# Altium PCB CH32V20xF8-R0-1v0.PcbDoc
Units mil, origin at the board's own origin, x right, y up, seen from the top; angles counter-clockwise.
Board outline 1496.06 x 2165.35 mil, 2 copper layers (Top Layer, Bottom Layer); 23 components, 30 nets, 110 pads, 405 vias.
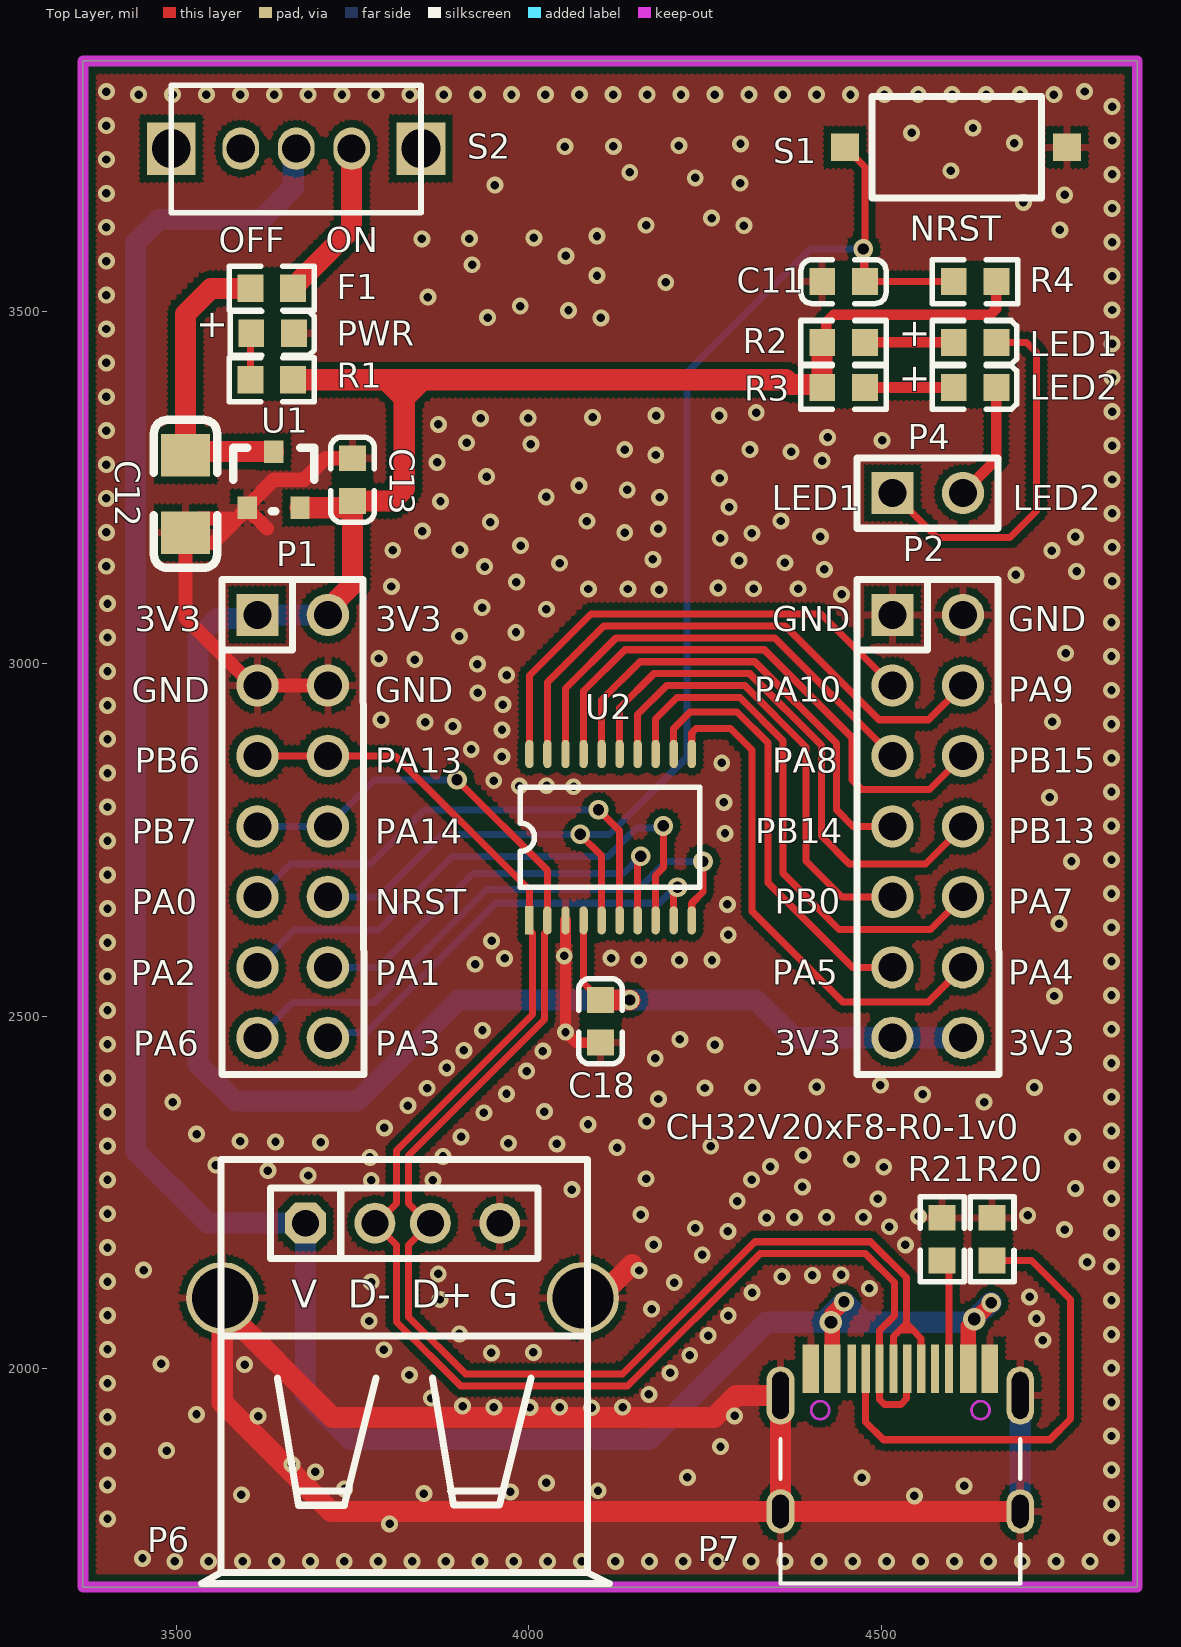
[diagram p0: Top Layer view]
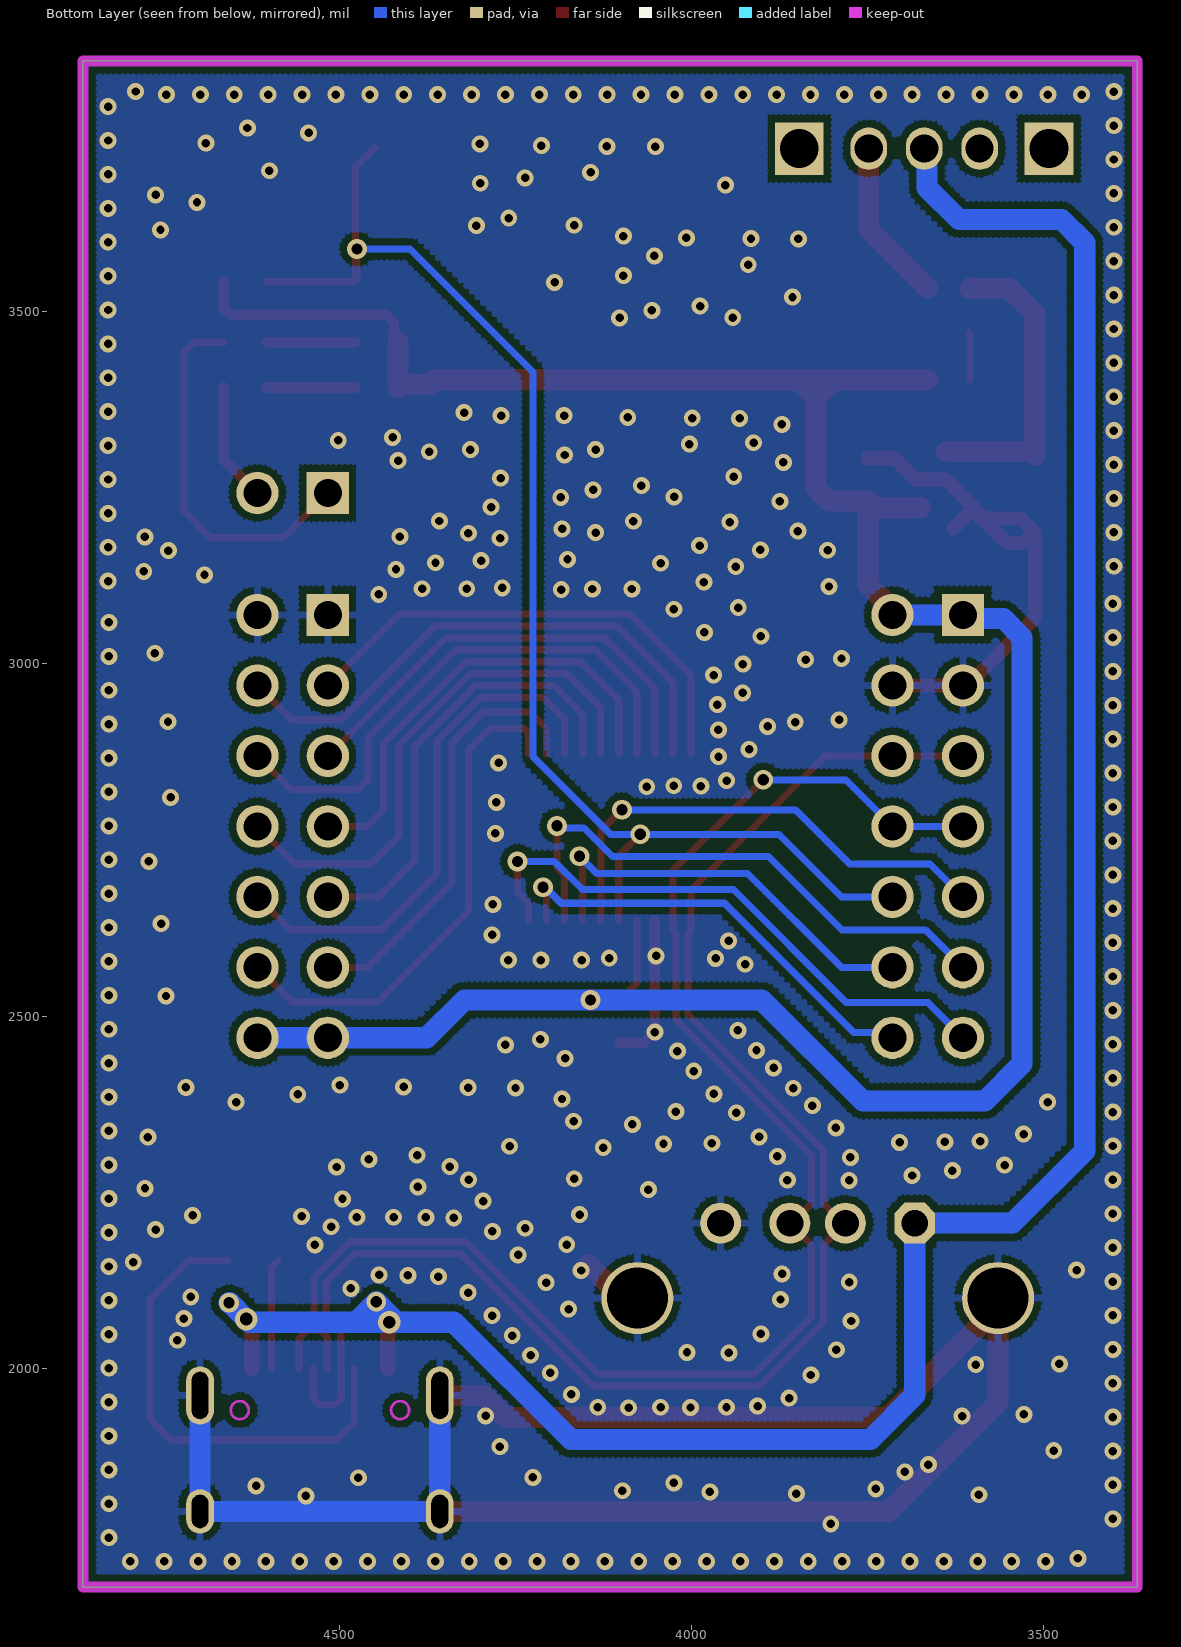
[diagram p1: Bottom Layer view, seen from below]

## Layer stack, top to bottom
Top Solder: solder mask 0.4, Solder Resist, Dk 3.5
Top Layer: signal copper 1.4
Dielectric 1: dielectric 12.6, FR-4, Dk 4.8
Bottom Layer: signal copper 1.4
Bottom Solder: solder mask 0.4, Solder Resist, Dk 3.5

## Board outline
3367.52,1690 4863.58,1690 4863.58,3855.35 3367.52,3855.35

## Design rules (kind name [scope] priority, off if disabled: settings)
Clearance Clearance_1 [InPolygon] p1: gap=10 ignorepadtopadclearanceinfootprint=FALSE
Clearance [All] p2: gap=7 ignorepadtopadclearanceinfootprint=FALSE
ComponentClearance [All] p1 off: gap=10 collisioncheckmode=3 verticalgap=10 showdistances=FALSE
DiffPairsRouting [All] p1: maxlimit=10 minlimit=7 mostfreqgap=8 toplayer_minwidth=6 toplayer_maxwidth=15 toplayer_prefwidth=8 bottomlayer_minwidth=6 bottomlayer_maxwidth=15 bottomlayer_prefwidth=8 maxuncoupledlength=500
MinimumSolderMaskSliver [All] p1 off: minsoldermaskwidth=10
PolygonConnect PolygonConnect_1 [IsVia] p1: connectstyle=Direct reliefconductorwidth=10 reliefentries=4 polygonreliefangle="90 Angle" airgapwidth=10
PolygonConnect [All] p2: connectstyle=Relief reliefconductorwidth=10 reliefentries=4 polygonreliefangle="90 Angle" airgapwidth=10
RoutingVias [All] p1: holewidth=16 width=28 viastyle="Through Hole" minholewidth=12 minwidth=24 maxholewidth=28 maxwidth=50
SilkToSilkClearance [All] p1 off: silktosilkclearance=10
SilkToSolderMaskClearance [IsPad] p1 off: minsilkscreentomaskgap=10 clearancetoexposedcopper=TRUE
SolderMaskExpansion [All] p1: expansion=4 istentingtop=FALSE
Width [All] p1: maxlimit=100 minlimit=6 preferedwidth=10
25 further rules are at their usual default settings.

## Classes and differential pairs
differential pair NewDifferentialPair1: +PA13 -PA14

## Components (designator, comment, footprint, x,y, rotation, side; value= is the part's Value field where it differs from the comment)
C11 "0.1uF" 0603_C 4416.37,3542.25 r0 top
C12 "10uF" 3216_C 3513,3296 r90 top
C13 "2.2uF" 0603_C 3750,3291.63 r270 top
C18 "0.1uF" 0603_C 4101.87,2462.44 r90 top value=15pF
F1 "500mA" 0603 3665.63,3533 r180 top
LED1 "LED1" 0603+ 4603,3456 r0 top (schematic designator D2)
LED2 "LED2" 0603+ 4603,3392 r0 top (schematic designator D3)
P1 "Header 7X2" IDC14-2.54mm 3615,3069.32 r0 top
P2 "Header 7X2" IDC14-2.54mm 4516.1,3069.32 r0 top
P4 "2HEAD" SIP2-2.54mm 4516.1,3242.32 r270 top
P6 "USB_A" USBAF 3683.29,2206.31 r0 top
P7 "TYPE-C" TYPE-C-Receptacle-2.0 4527.34,2000 r0 top
PWR "POWER  red" 0603+ 3606.38,3469 r0 top (schematic designator D1)
R1 "1K" 0603 3605,3403 r0 top
R2 "1K" 0603 4416.37,3456 r0 top
R3 "1K" 0603 4416.37,3392 r0 top
R4 "10K" 0603 4603,3542.25 r0 top
R20 "NC(5.1K)" 0603 4657.48,2153.23 r90 top
R21 "NC(5.1K)" 0603 4586.61,2153.23 r90 top
S1 "NRST" SMD_6.1x3.65x2.5mm-KEY 4448.82,3732.91 r0 top
S2 "SW" KEY2 3670,3731 r0 top
U1 "6219P33M" SOT-23 3600.6,3221.47 r0 top
U2 "CH32V203F8" TSSOP20 4000.99,2636 r0 top

## Footprints (in the part's own frame and the unit in brackets; to place one, negate y for a bottom-side part, rotate by r counter-clockwise, add the part's x,y. Pads: shape width x height; smd on the part's side, far side on the other; paste and mask are expansions set on the pad)
0603 [mm]
  rect 0.93x0.98 smd: 1(0,0) 2(1.54,0)
  silkscreen extent -0.76,-0.79 2.3,0.79
0603+ [mm]
  rect 0.93x0.98 smd: 1(0,0) 2(1.54,0)
  silkscreen extent -0.76,-0.79 2.27,0.79
0603_C [mm]
  rect 0.93x0.98 smd: 1(0,0) 2(1.54,0)
  silkscreen extent -0.76,-0.79 2.31,0.79
3216_C [mil]
  rect 60x70 smd: 1(0,0) 2(-110,0)
  silkscreen extent -160,-45 50,45
IDC14-2.54mm [mil]
  rect 60x60 hole 40: 1(0,0)
  round 60 hole 40: 2(100,0) 3(0,-100) 4(100,-100) 5(0,-200) 6(100,-200) 7(0,-300) 8(100,-300) 9(0,-400) 10(100,-400) 11(0,-500) 12(100,-500) 13(0,-600) 14(100,-600)
  silkscreen extent -50,-652 151,50
KEY2 [mm]
  rect 1.75x1.9 hole 1.4: 0(-4.5,0) 0(4.5,0)
  oval 1.321x1.524 hole 1.016: 1(0,0) 2(-2,0) 3(2,0)
  silkscreen extent -4.51,-2.31 4.5,2.29
SIP2-2.54mm [mil]
  rect 60x60 hole 40: 1(0,0)
  round 60 hole 40: 2(0,100)
  silkscreen extent -50,-50 50,150
SMD_6.1x3.65x2.5mm-KEY [mm]
  rect 1x1 smd: 1(0,0) 2(8,0)
  silkscreen extent 0.98,-1.83 7.08,1.83
SOT-23 [mm]
  rect 0.7x0.8 smd: 1(0,0) 2(1.9,0) 3(0.95,2.02)
  silkscreen extent -0.51,-0.13 2.41,2.16
TSSOP20 [mil]
  rect 12x40 smd: 1(0,0)
  oval 12x40 smd: 2(25.6,0) 3(51.2,0) 4(76.8,0) 5(102.4,0) 6(128,0) 7(153.5,0) 8(179.1,0) 9(204.7,0) 10(230.3,0) 11(230.3,236) 12(204.7,236) 13(179.1,236) 14(153.5,236) 15(128,236) 16(102.4,236) 17(76.8,236) 18(51.2,236) 19(25.6,236) 20(0,236)
  silkscreen extent -13,47 242,189
TYPE-C-Receptacle-2.0 [mm]
  oval 1x1.6 hole 0.6 slot 1.2 at 90 deg: 0(-4.32,-5.15) 0(4.32,-5.15)
  oval 1x2.1 hole 0.6 slot 1.7 at 90 deg: 0(-4.32,-0.97) 0(4.32,-0.97)
  rect 0.6x1.75 smd: A1(-3.225,0) A4(-2.45,0) B1(3.225,0) B4(2.45,0)
  rect 0.3x1.75 smd: A5(-1.25,0) A6(-0.25,0) A7(0.25,0) A8(1.25,0) B5(1.75,0) B6(0.75,0) B7(-0.75,0) B8(-1.75,0)
  Keep-Out Layer circle w0.1: c-2.89,-1.5 r0.325
  Keep-Out Layer circle w0.1: c2.89,-1.5 r0.325
  silkscreen extent -4.32,-7.75 4.32,-2.55
USBAF [mm]
  round 2.6 hole 2.2: 0(-3,-2.7) 0(10,-2.7)
  oct 1.473x1.473 hole 0.965: 1(0,0)
  round 1.473 hole 0.965: 2(2.5,0) 3(4.5,0) 4(7,0)
  silkscreen extent -3.75,-12.99 10.95,2.29

## Part data
C11 C18: library part Cap, "Capacitor", LatestRevisionDate=17-Jul-2002, LatestRevisionNote="Re-released for DXP Platform.", PackageReference=RAD-0.3, Published=8-Jun-2000, Publisher="Altium Limited"
C12 C13: library part CAP, "Capacitor"
F1: library part FUSE1, "Fuse"
LED1 LED2 PWR: library part LED0, "Typical INFRARED GaAs LED", LatestRevisionDate=08-Jul-2005, LatestRevisionNote="Mech Layer 1 removed.", PackageReference=LED-0, Published=8-Jun-2000, Publisher="Altium Limited"
P1 P2: "Header, 7-Pin, Dual row", LatestRevisionDate=17-Jul-2002, LatestRevisionNote="Re-released for DXP Platform.", Publisher="Altium Limited"
P6: library part USB, "USB Port"
P7: library part TYPE-C1
R1 R2 R3: library part "Res Semi", "Semiconductor Resistor", LatestRevisionDate=17-Jul-2002, LatestRevisionNote="Re-released for DXP Platform.", PackageReference=AXIAL-0.5, Published=8-Jun-2000, Publisher="Altium Limited"
R4 R20 R21: library part Res2, "Resistor"
  R4: LatestRevisionDate=17-Jul-2002, LatestRevisionNote="Re-released for DXP Platform.", PackageReference=AXIAL-0.4, Published=8-Jun-2000, Publisher="Altium Limited"
S1: library part KEY
U2: "RISC-V LMD-MCU, 144MHz, for motor"

## Via types
v1: diameter 24, hole 12, Top Layer to Bottom Layer, tented both sides, 392 vias
v2: diameter 28, hole 16, Top Layer to Bottom Layer, tented both sides, 11 vias
v3: diameter 32, hole 18, Top Layer to Bottom Layer, tented both sides, 2 vias

## Nets (pads, with @x,y where several pads share a name; then routed paths per layer and width w, separated by ;. In a path a pad name is that pad's centre, name@x,y a point inside that pad or via, vN(x,y) a via of type N, cw(c..) or ccw(c..) an arc to the next point about the centre after c; other vN are vias at no path point)
+5V: P6.1 P7.A4 P7.B4 S2.1 | length 3564.2
  Top Layer w22: v3(4428.8,2065.67) v3@4430.88,2063.59 ; P7.A4 v3@4430.88,2063.59 ; v2(4447.27,2094.76) 4430.88,2078.37 v3@4430.88,2063.59 ; P7.B4 4623.8,2060.36 v3@4632.01,2068.57 ; v3(4632.01,2070.2) v3@4632.01,2068.57 ; v2(4656.39,2093.3) 4656.39,2092.96 v3@4632.01,2068.57
  Bottom Layer w22: v3(4428.8,2065.67) 4430.72,2067.58 4430.72,2076.58 4447.27,2093.13 v2(4447.27,2094.76) 4448.42,2093.61 4448.42,2071.97 4454.72,2065.67 ; v3@4627.48,2065.67 v3(4632.01,2070.2)
  Bottom Layer w30: S2.1 3665.79,3726.79 3665.79,3675.45 3620.75,3630.41 3475.12,3630.41 3442.14,3597.43 3442.14,2308.85 3544.68,2206.31 P6.1 3683.29,1962.24 3746.39,1899.14 4170.97,1899.14 4337.5,2065.67 4418.19,2065.67 v3(4428.8,2065.67) 4454.72,2065.67 4476.36,2065.67 ; v3@4423.49,2070.98 4429.9,2077.39 v2(4447.27,2094.76) ; v2@4448.42,2093.61 4476.36,2065.67 ; v3@4627.48,2065.67 4476.36,2065.67 ; v3(4632.01,2070.2) 4655.12,2093.3 v2(4656.39,2093.3)
GND: C11.1 C12.2 C13.1 C18.1 P1.3 P1.4 P2.1 P2.2 P6.0 P6.4 P7.0 P7.A1 P7.B1 PWR.2 R20.2 R21.2 S1.2 U1.1 U2.3 | length 4138.8
  Top Layer w15: U2.3 v1(4052.19,2477.35) 4067.1,2462.44 C18.1
  Top Layer w20: 3628.38,3191.72 U1.1@3600.6,3219.5 ; P1.4 3608.65,2969.32 3513,3064.97 C12.2 ; C13.1 3711.75,3291.63 3681.21,3261.1 3638.25,3261.1 3600.6,3223.44 U1.1 U1.1@3600.6,3219.5 ; C12.2 3527.55,3171.45 3552.55,3171.45 U1.1@3596.82,3215.72 ; C12.2 3533,3206 3585.13,3206 3594.85,3215.72 U1.1@3596.82,3215.72 ; U1.1@3596.82,3215.72 U1.1@3600.6,3219.5
  Top Layer w30: P6.0@4076.99,2087.01 P6.0@4086.11,2087.01 ; P6.0@4087.61,2087.01 P6.0@4086.11,2087.01 ; 4146.53,2147.43 P6.0@4086.11,2087.01 ; P7.0@4697.42,1797.24 P7.0@4357.26,1797.24 ; P7.0@4357.26,1797.24 3719.69,1797.24 3565.18,1951.76 3565.18,2087.01 3721.52,1930.67 4263.13,1930.67 4294.28,1961.81 4357.26,1961.81 P7.0@4357.26,1797.24
  Bottom Layer w30: P7.0@4357.26,1961.81 4357.26,1797.24 4697.42,1797.24 P7.0@4697.42,1961.81
  other v1: 3497.76,1726.36 3545.86,1726.36 3593.96,1726.36 3642.06,1726.36 3690.16,1726.36 3738.26,1726.36 3786.36,1726.36 3834.46,1726.36 3882.56,1726.36 3930.66,1726.36 3978.76,1726.36 4026.86,1726.36 4074.96,1726.36 4123.06,1726.36 4171.16,1726.36 4219.26,1726.36 4267.36,1726.36 4315.46,1726.36 4363.56,1726.36 4411.66,1726.36 4459.76,1726.36 4507.86,1726.36 4555.96,1726.36 4604.06,1726.36 4652.16,1726.36 4700.26,1726.36 4748.36,1726.36 4796.46,1726.36 3451.98,1730.5 4826.91,1759.99 3802.52,1779.54 3402.33,1786.7 4826.91,1808.09 4547.35,1819.25 3592.3,1820.92 3851.29,1822.44 3973.95,1824.96 4098.28,1826.64 3738.72,1829.16 4617.92,1833.52 3402.33,1834.8 4025.03,1837.69 4472.71,1845.03 4225.18,1845.51 3697.41,1853.34 4826.91,1856.19 3663.95,1863.61 3402.33,1882.9 3486.08,1883.53 4272.14,1889.12 4826.91,1904.29 3402.33,1931 3616.07,1932.49 4292.27,1932.73 3528.57,1934.97 4089.27,1944.33 3950.49,1945.09 4001.58,1944.71 4043.9,1945.09 4133.12,1945.09 3906.27,1946.62 4826.91,1952.39 3861.66,1958.06 4170.48,1963.39 3402.33,1979.1 3830.78,1990.85 4200.6,1993.89 4826.91,2000.49 3596.75,2005.58 3478.25,2006.53 4228.46,2018.92 3947.06,2022.11 4006.54,2022.87 3402.33,2027.2 3794.56,2026.68 4729.59,2040.09 4254.49,2046.78 3901.69,2049.18 4826.91,2048.59 3773.59,2067.48 4720.48,2070.95 3402.33,2075.3 4283.11,2074.99 4174.48,2084.42 4826.91,2096.69 3873.86,2097.98 4710.66,2101.8 4317.09,2107.79 4483.48,2113.7 4206.51,2122.05 3402.33,2123.4 3776.26,2122.76 4359.17,2130.37 4402.62,2132.08 4443.33,2132.77 3871.57,2134.2 4156.67,2139.1 3453.65,2139.59 4826.91,2144.79 4792.27,2151.11 4246.17,2161.2 3402.33,2171.5 4534.41,2175.44 4177.16,2175.83 4826.91,2192.89 4282.61,2194.63 4760.45,2197.08 4236.32,2199.03 4511.63,2201.16 4337.48,2213.74 4376.93,2214.36 4422.72,2214.66 4474.86,2214.66 4553.32,2216 4707.91,2217.29 4158.99,2218.36 3402.33,2219.6 4295.86,2237.69 4495.36,2240.78 4826.91,2240.99 4061.21,2254.01 4775.6,2255.68 4388.26,2257.79 3776.61,2266.92 3864.06,2267.38 3402.33,2267.7 4316.35,2267.85 4166.52,2269.28 3686.99,2273.9 3629.9,2280.84 4503.71,2286.01 4342.99,2286.6 3555.85,2288.56 4826.91,2289.09 4457.88,2296.72 3774.71,2299.65 3878.37,2301.08 4389.42,2302.67 4125.31,2313.54 4258.26,2315.44 3402.33,2315.8 4039.84,2318.88 3971.15,2319.65 3704.73,2320.96 3590.56,2322.5 3640.7,2321.73 4771.56,2328.42 3904.19,2328.71 3528.85,2332.53 4826.91,2337.19 3795.13,2341.41 4084.1,2346.36 4167.29,2350.94 3936.33,2362.96 3402.33,2363.9 4022.29,2364.67 3828.53,2372.95 3494.91,2378.04 4646.25,2378.08 4183.9,2382.46 4826.91,2385.29 4558.79,2389.09 3968.47,2389.83 3855.71,2397.73 4249.85,2398.09 4317.16,2398.59 4717.59,2398.84 4408.72,2399.58 4498.95,2402.08 3402.33,2412 3996.92,2421.97 3883.64,2426.71 4826.91,2433.39 4179.5,2440.23 4020.1,2450.42 3907.87,2451.47 4264.21,2459.3 3402.33,2460.1 4214.6,2466.94 3934.41,2479.84 4826.91,2481.49 3402.33,2508.2 4745.77,2528.6 4826.91,2529.59 3402.33,2556.3 3923.94,2573.68 4826.91,2577.69 4156.07,2579.52 4213.84,2579.52 4260.05,2579.52 3965.92,2581.95 4116.79,2582.4 4050.45,2585.53 3402.33,2604.4 3947.47,2606.75 4283.16,2615.33 4826.91,2625.79 4752.67,2631.34 3402.33,2652.5 4282,2658.66 4826.91,2673.89 3402.33,2700.6 4770.15,2719.68 4826.91,2721.99 3402.33,2748.7 4278.52,2759.36 4826.91,2770.09 3402.33,2796.8 4276.98,2803.28 4739.21,2810.4 4826.91,2818.19 3986.74,2826.41 4063.68,2825.59 4025.35,2826.95 3950.32,2834.35 3402.33,2844.9 4273.89,2859.52 4826.91,2866.29 3961.82,2868.3 3918.5,2878.49 3402.33,2893 3962.09,2906.09 3892.26,2911.29 4826.91,2914.39 3852.9,2917.12 4742.94,2917.82 3790.57,2920.4 3402.33,2941.1 3963.46,2941.97 3927.61,2958.67 4826.91,2962.49 3968.66,2983.86 3402.33,2989.2 3927.25,2999.49 3838.32,3006.05 3787.29,3007.51 4826.91,3010.59 4761.69,3014.93 3402.33,3037.3 3901.67,3039.12 3981.92,3044.69 4826.91,3058.69 4025.12,3077.38 3933.81,3079.6 3402.33,3085.4 4443.89,3098.4 4185.01,3105.13 4084.68,3106.11 4140.69,3106.11 4319.04,3106.43 4382.35,3106.43 4268.65,3107.76 3805.05,3109.7 3982.62,3115.91 4827.85,3117.22 4691.16,3126.09 4777.31,3131 4419.45,3133.89 3400.69,3138.38 3937.38,3137.94 4043.93,3142.7 4363.36,3143.37 4298.59,3146.53 4176.08,3148.06 3807.03,3161.17 4742.39,3160.69 3902.26,3161.75 4827.85,3165.32 3988.57,3167.7 4271.73,3178.13 4413.92,3180.5 4775.65,3179.98 4316.76,3185.24 3400.69,3186.48 4136.2,3186.15 3849.09,3188.39 4183.82,3191.51 3945.72,3201.03 4082.63,3202.23 4357.83,3202.62 4827.85,3213.42 4284.37,3222.37 3874.83,3230.45 3400.69,3234.58 4185.61,3236.16 4024.89,3236.75 4139.77,3246.87 4071.32,3252.82 4827.85,3261.52 4270.94,3263.44 3940.16,3265.59 3400.69,3282.68 3869.88,3285.88 4416.3,3288.18 4180.25,3296.28 4372.28,3300.85 4136.2,3304.01 4313.79,3303.86 4827.85,3309.62 4003.01,3311.62 3911.95,3313.6 4501.33,3317.13 4424.14,3321.35 3400.69,3330.78 3871.86,3339.83 3931.74,3348.24 3999.05,3348.74 4090.61,3349.73 4180.84,3352.23 4270.37,3352.1 4322.83,3356.33 4827.85,3357.72 3400.69,3378.88 4827.85,3405.82 3400.69,3426.98 4827.85,3453.92 3400.69,3475.08 3941.54,3491.33 4102.26,3490.73 4056.43,3501.45 4827.85,3502.02 3987.97,3507.4 3856.81,3520.17 3400.69,3523.18 4194.47,3541.31 4827.85,3550.12 4096.9,3550.85 3919.67,3566.2 3400.69,3571.28 4052.86,3578.83 4827.85,3598.22 3848.4,3602.82 3915.71,3603.31 4007.27,3604.3 4096.9,3606.81 4753.59,3615.6 3400.69,3619.38 4166.57,3622.3 4305.29,3621.71 4259.45,3632.42 4827.85,3646.32 4701.78,3654.7 4760.43,3665.45 3400.69,3667.48 3952.06,3679.14 4299.93,3681.83 4236.23,3689.57 4827.85,3694.42 4143.35,3697.17 4599.14,3699.66 3400.69,3715.58 4051.43,3733.79 4120.13,3734.29 4213.01,3735.28 4300.53,3737.78 4689.07,3738.76 4827.85,3742.52 4543.43,3753.43 4630.42,3760.27 3400.69,3763.68 4827.85,3790.62 3446.47,3807.63 3494.57,3807.63 3542.67,3807.63 3590.77,3807.63 3638.87,3807.63 3686.97,3807.63 3735.07,3807.63 3783.17,3807.63 3831.27,3807.63 3879.37,3807.63 3927.47,3807.63 3975.57,3807.63 4023.67,3807.63 4071.77,3807.63 4119.87,3807.63 4167.97,3807.63 4216.07,3807.63 4264.17,3807.63 4312.27,3807.63 4360.37,3807.63 4408.47,3807.63 4456.57,3807.63 4504.67,3807.63 4552.77,3807.63 4600.87,3807.63 4648.97,3807.63 4697.06,3807.63 4745.16,3807.63 3400.69,3811.78 4788.78,3812.07
LED1: LED1.2 P4.1 | length 533.9
  Top Layer w10: P4.1 4579.19,3179.24 4683.03,3179.24 4720.4,3216.6 4720.4,3442.02 4706.42,3456 LED1.2
LED2: LED2.2 P4.2 | length 169.4
  Top Layer w15: P4.2 4663.63,3289.85 LED2.2
NetC12_1: C12.1 F1.2 U1.3 | length 434.6
  Top Layer w30: F1.2 3604.55,3532.55 3549.21,3532.55 3513,3496.34 C12.1 3518,3301 U1.3
NetF1_1: F1.1 S2.3 | length 231.4
  Top Layer w30: F1.1@3665.63,3533.98 3748.74,3617.09 S2.3
NetLED1_1: LED1.1 R2.2 | length 126
  Top Layer w15: R2.2 LED1.1
NetLED2_1: LED2.1 R3.2 | length 126
  Top Layer w15: R3.2 LED2.1
NetP7_A5: P7.A5 R20.1 | length 692.8
  Top Layer w10: P7.A5 4478.13,1924.04 4503.23,1898.93 4739.31,1898.93 4768.72,1928.35 4768.72,2097.79 4713.29,2153.23 R20.1
NetP7_B5: P7.B5 R21.1 | length 157.2
  Top Layer w10: R21.1 4596.24,2143.61 P7.B5
NetPWR_1: PWR.1 R1.1 | length 66.6
  Top Layer w10: R1.1 3605,3467.62 PWR.1
NRST: C11.2 P1.10 R4.1 S1.1 U2.5 | length 1967.9
  Top Layer w10: v2(4073,2758) 4103.39,2727.61 U2.5 ; S1.1 4477,3704.73 C11.2@4477,3544.48 ; v2(4474.77,3588.43) 4474.77,3544.48 C11.2 R4.1
  Bottom Layer w10: P1.10 3787.53,2669.32 3876.21,2758 v2(4073,2758) 4114.73,2758 4224.9,2868.18 4224.9,3413.89 4399.45,3588.43 v2(4474.77,3588.43)
PA0: P1.9 U2.6 | length 704.4
  Top Layer w10: v2(4098.9,2792.84) 4128.61,2763.13 4128.61,2636.38 U2.6
  Bottom Layer w10: P1.9 3661.77,2716.09 3775.65,2716.09 3852.4,2792.84 v2(4098.9,2792.84)
PA1: P1.12 U2.7 | length 602.2
  Top Layer w10: U2.7 4154.49,2722.49 v2(4159,2727)
  Bottom Layer w10: P1.12 3787.45,2569.32 3920.71,2702.59 4134.59,2702.59 v2(4159,2727)
PA2: P1.11 U2.8 | length 797.6
  Top Layer w10: U2.8 4180.09,2699.85 4191,2710.75 v2(4191,2770)
  Bottom Layer w10: P1.11 3667.83,2622.15 3786.77,2622.15 3891.02,2726.4 4112.4,2726.4 4152.77,2766.77 4187.77,2766.77 v2(4191,2770)
PA3: P1.14 U2.9 | length 633.7
  Top Layer w10: U2.9 4205.69,2677.69 v2(4211,2683)
  Bottom Layer w10: P1.14 3722.6,2476.92 3769.91,2476.92 3953.23,2660.24 4184.98,2660.24 4207.74,2683 v2(4211,2683)
PA4: P2.12 U2.11 | length 732.2
  Top Layer w10: U2.11 4231.29,2901.84 4237.55,2908.09 4286.32,2908.09 4316.67,2877.74 4316.67,2648.8 4445.1,2520.37 4567.15,2520.37 P2.12
PA5: P2.11 U2.12 | length 623.1
  Top Layer w10: U2.12 4205.69,2908.41 4229.11,2931.83 4295.67,2931.83 4339.8,2887.7 4339.8,2688.97 4459.45,2569.32 P2.11
PA6: P1.13 U2.10 | length 825.9
  Top Layer w10: U2.10 4231.29,2660.17 4247.13,2676 v2(4247.13,2719.57)
  Bottom Layer w10: P1.13 3664.76,2519.08 3780.17,2519.08 3940.75,2679.67 4155.02,2679.67 4194.92,2719.57 v2(4247.13,2719.57)
PA7: P2.10 U2.13 | length 763.5
  Top Layer w10: U2.13 4180.09,2921.55 4210.46,2951.92 4299.63,2951.92 4361.11,2890.44 4361.11,2702.49 4440.43,2623.16 4569.94,2623.16 P2.10
PA8: P2.5 U2.18 | length 656.1
  Top Layer w10: U2.18 4052.19,2964.99 4124.12,3036.92 4348.51,3036.92 P2.5
PA9: P2.4 U2.19 | length 799.9
  Top Layer w10: U2.19 4026.59,2973.83 4106.68,3053.92 4363.65,3053.92 4496.99,2920.58 4567.36,2920.58 P2.4
PA10: P2.3 U2.20 | length 704.9
  Top Layer w10: U2.20 4000.99,2983.48 4088.43,3070.92 4414.51,3070.92 P2.3
PA13: P1.5 P1.6 P6.2 P7.A7 P7.B7 U2.1 | length 2290.1
  Top Layer w10: P1.5 P1.6 3810.53,2869.32 4000.99,2678.86 U2.1 4000.99,2622 4005.29,2617.7 4005.29,2502.29 3812.59,2309.59 3812.59,2234.44 3788.22,2210.07 P6.2@3788.22,2199.81 ; P6.2 P6.2@3788.22,2199.81 ; P7.A7 4536.28,1999.09 4536.28,1957.28 4528,1949 4505,1949 4497.81,1956.19 P7.B7 4497.81,2053.97 4515.93,2072.09 4518.84,2075 4518.84,2122.16 4478.06,2162.94 4327.98,2162.94 4140.04,1975 3903.54,1975 3812.59,2065.96 3812.59,2175.44 P6.2@3788.22,2199.81
PA14: P1.7 P1.8 P6.3 P7.A6 P7.B6 U2.2 | length 2303.4
  Top Layer w10: P6.3 P6.3@3853.96,2199.81 ; v2(3898.29,2835.31) 4026.59,2707 U2.2 4026.59,2621.46 4022.29,2617.16 4022.29,2495.25 3829.59,2302.54 3829.59,2234.44 3853.96,2210.07 P6.3@3853.96,2199.81 ; P7.A6 4517.5,2045.5 4526.67,2054.67 ; P7.B6 4556.87,2042.81 4545.01,2054.67 ; P6.3@3853.96,2199.81 3829.59,2175.44 3829.59,2073 3910.59,1992 4133,1992 4320.94,2179.94 4485.11,2179.94 4535.84,2129.2 4535.84,2063.84 ; 4526.67,2054.67 4545.01,2054.67 ; 4526.67,2054.67 4535.84,2063.84 ; 4535.84,2063.84 4545.01,2054.67
  Bottom Layer w10: P1.7 P1.8 3780.98,2835.31 v2(3898.29,2835.31)
PB0: P2.9 U2.14 | length 653.4
  Top Layer w10: U2.14 4154.49,2928.04 4195.37,2968.92 4306.67,2968.92 4393.49,2882.1 4393.49,2720.36 4444.52,2669.32 P2.9
PB13: P2.8 U2.15 | length 781.9
  Top Layer w10: U2.15 4128.99,2937.47 4177.44,2985.92 4313.71,2985.92 4415.23,2884.4 4415.23,2755.65 4454.8,2716.08 4562.86,2716.08 P2.8
PB14: P2.7 U2.16 | length 663.8
  Top Layer w10: U2.16 4103.39,2948.63 4157.69,3002.92 4320.75,3002.92 4436.98,2886.69 4436.98,2792.37 4460.02,2769.32 P2.7
PB15: P2.6 U2.17 | length 788.9
  Top Layer w10: U2.17 4077.79,2961.31 4136.4,3019.92 4334.2,3019.92 4459.08,2895.04 4459.08,2835.14 4472.58,2821.65 4568.43,2821.65 P2.6
VCC: C13.2 C18.2 P1.1 P1.2 P2.13 P2.14 R1.2 R2.1 R3.1 R4.2 U1.2 U2.4 | length 3857.2
  Top Layer w10: U2.4 4077.79,2547.14 4087.57,2537.36 4087.57,2536.38 4100.88,2523.07 C18.2
  Top Layer w15: R2.1 4423.06,3462.69 4422.35,3463.41 4422.35,3484.66 4433.05,3495.36 4654.84,3495.36 4663.63,3504.15 R4.2
  Top Layer w30: R1.2 3797.41,3403 ; U1.2 3739.49,3221.47 3749.02,3231 C13.2 ; P1.2 3715,3077.44 3750,3112.44 C13.2 ; C18.2 v2(4143.4,2523.07) ; R3.1 R3.1@4416.37,3392.98 ; R2.1 R3.1@4416.37,3392.98 ; C13.2 3805.74,3231 3823.31,3248.57 3823.31,3377.1 ; 3797.41,3403 3823.31,3403 ; 3797.41,3403 3823.31,3377.1 ; 3823.31,3377.1 3849.21,3403 ; 3823.31,3377.1 3823.31,3403 ; 3823.31,3403 3849.21,3403 ; 3849.21,3403 3875.2,3403 4364.65,3403 4371.36,3396.29 4413.06,3396.29 R3.1@4416.37,3392.98
  Bottom Layer w30: P1.2 P1.1 3609.73,3064.05 3557.57,3064.05 3530.96,3037.43 3530.96,2432.44 3583.95,2379.45 3756.85,2379.45 3900.47,2523.07 v2(4143.4,2523.07) 4322.44,2523.07 4376.19,2469.32 P2.13 P2.14
pads on no net: P7.A8 P7.B8 S2.0 S2.2

## Polygon pours and split planes (outlines as drawn)
GND on Bottom Layer "GND" (hatched 90Degree grid 8 track 8, remove dead copper, pour order 1): 3367.52,3855.35 3367.52,1690 4863.58,1690 4863.58,3855.35
GND on Top Layer "GND" (hatched 90Degree grid 8 track 8, remove dead copper, pour order 0): 3367.52,3855.35 3367.52,1690 4863.58,1690 4863.58,3855.35

## Keep-outs
Keep-Out Layer:
  the board outline again, w15

## Silkscreen, mask and mechanical layers (free items; w line width, h text height)
Top Overlay:
  text "OFF" at 3560,3584 h35
  text "ON" at 3712,3584 h35
  text "LED1" at 4345,3218 h35
  text "LED2" at 4687,3218 h35
  text "3V3" at 3440.67,3046.16 h35
  text "3V3" at 3782.38,3046.16 h35
  text "GND" at 4345.44,3046.22 h35
  text "GND" at 4680.74,3046.22 h35
  text "GND" at 3437,2945.73 h35
  text "GND" at 3782.38,2945.73 h35
  text "PA10" at 4319.78,2945.94 h35
  text "PA9" at 4680.74,2945.94 h35
  text "PA8" at 4345.44,2845.66 h35
  text "PB15" at 4680.74,2845.66 h35
  text "PB6" at 3440.67,2845.31 h35
  text "PA13" at 3782.38,2845.31 h35
  text "PB7" at 3437,2744.89 h35
  text "PA14" at 3782.38,2744.89 h35
  text "PB14" at 4321.78,2745.38 h35
  text "PB13" at 4680.74,2745.38 h35
  text "PB0" at 4349.11,2645.1 h35
  text "PA7" at 4680.74,2645.1 h35
  text "PA0" at 3437,2644.47 h35
  text "NRST" at 3782.38,2644.47 h35
  text "PA5" at 4345.44,2544.83 h35
  text "PA4" at 4680.74,2544.83 h35
  text "PA2" at 3435.33,2544.05 h35
  text "PA1" at 3782.38,2544.05 h35
  text "3V3" at 4349.11,2444.55 h35
  text "3V3" at 4680.74,2444.55 h35
  text "PA6" at 3438.67,2443.62 h35
  text "PA3" at 3782.38,2443.62 h35
  text "CH32V20xF8-R0-1v0" at 4194.15,2325.39 h35
Mechanical 1:
  the board outline again, w10

## Text inside footprints (layer, text, board x,y; h text height)
LED1: Top Overlay "+" at 4564.92,3445.01 h40 r90
LED2: Top Overlay "+" at 4564.92,3381.01 h40 r90
P6: Top Overlay "G" at 3943.29,2086.31 h40; Top Overlay "V" at 3663.29,2086.31 h40; Top Overlay "D+" at 3833.29,2086.31 h40; Top Overlay "D-" at 3743.29,2086.31 h40
PWR: Top Overlay "+" at 3568.3,3458.01 h40 r90